# Altium PCB pcb.PcbDoc (part 2 of 3)
Units mil, origin at the board's own origin, x right, y up, seen from the top; angles counter-clockwise.
Board outline 2027.84 x 963.26 mil, 2 copper layers (Top Layer, Bottom Layer), stack 27.8 mil thick; 72 components, 62 nets, 350 pads, 49 vias.
Unrouted connection lines stored in the file: 14.
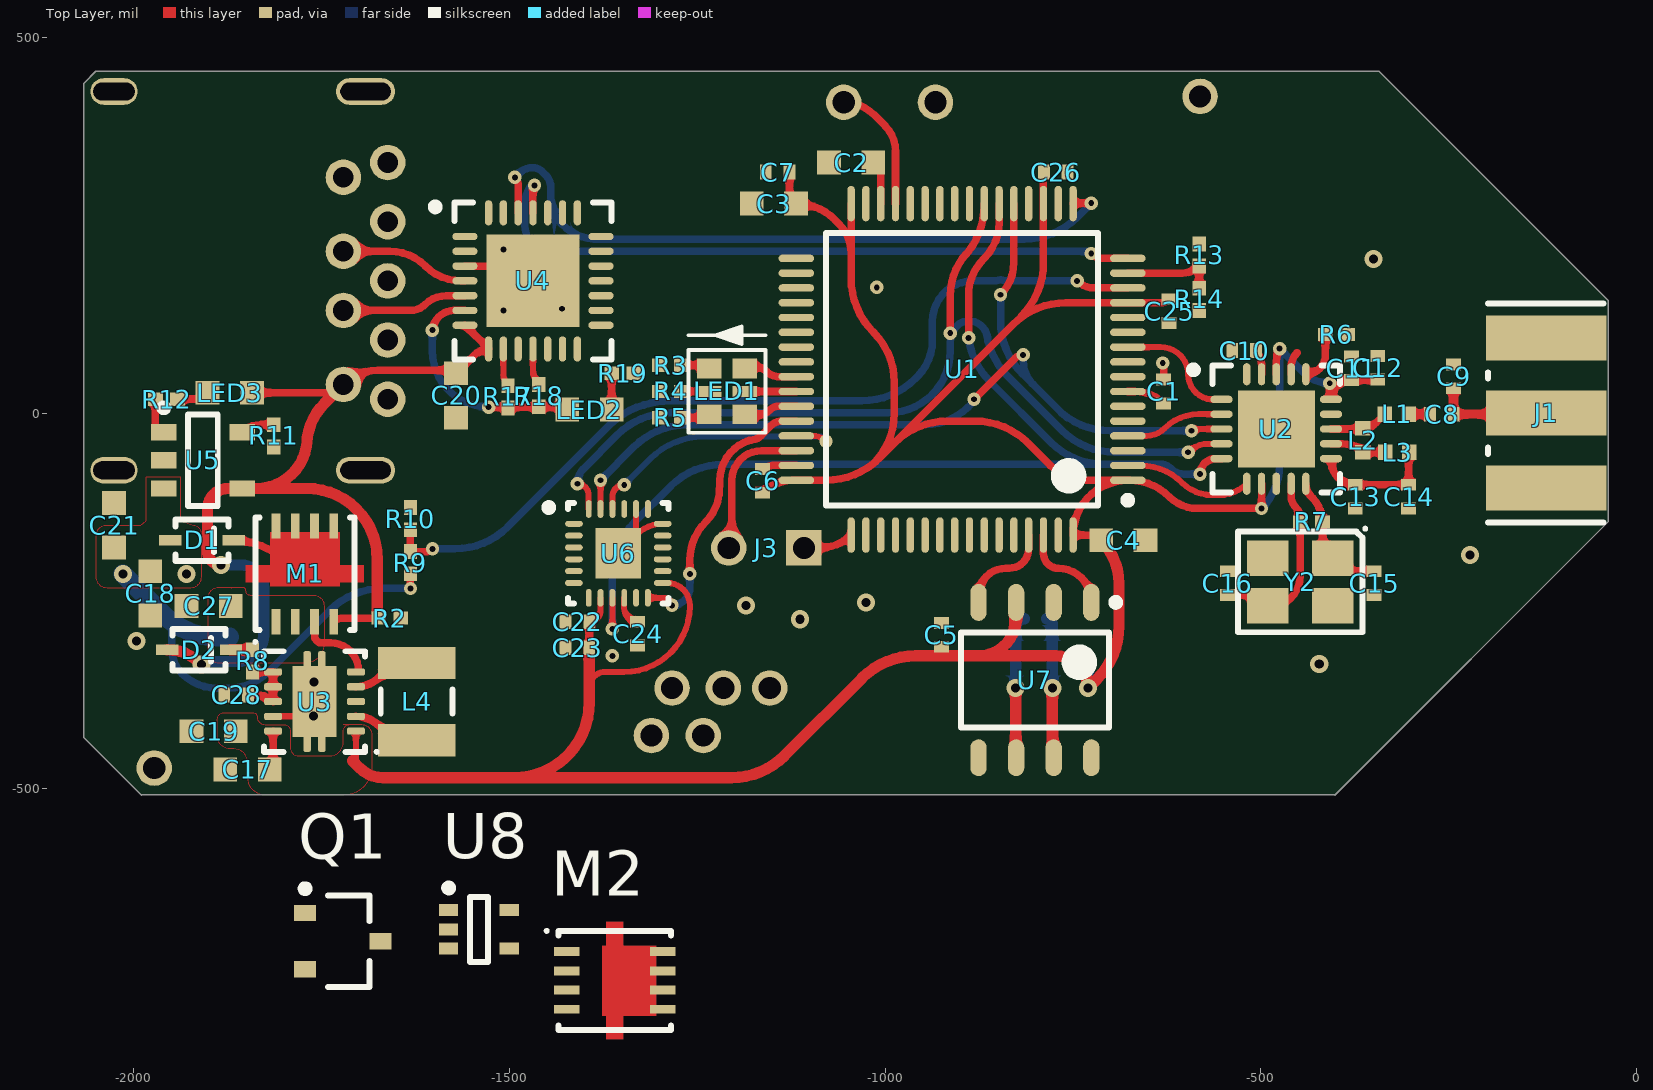
[diagram p0: Top Layer view]

## Part data (continued)
R1: library part R-120-0402, "120 Ohm 0402", Case Code (Imperial)=0402, Case Code (Metric)=1005, Manufacturer=Vishay, Manufacturer Part Number 1=CRCW040210K0FKED, Max Operating Temperature=155°C, Max Power Dissipation=63mW, Min Operating Temperature=-55°C, Package Quantity=10, Resistance=10kR, Supplier Part Number 1=541-10.0KLCT-ND, Temperature Coefficient=100ppm/°C, Tolerance=1%, Voltage Rating=50V, Case/Package=0402, ComponentLink1Description=http://www.yageo.com/documents/recent/PYu-RC_Group_51_RoHS_L_10.pdf?src-supplier=Digi-Key, ComponentLink1URL=http://www.yageo.com/documents/recent/PYu-RC_Group_51_RoHS_L_10.pdf?src-supplier=Digi-Key, ComponentLink2Description=http://www.farnell.com/datasheets/1018594.pdf?src-supplier=Element14, ComponentLink2URL=http://www.farnell.com/datasheets/1018594.pdf?src-supplier=Element14, ComponentLink3Description=http://www.mouser.com/ds/2/447/PYu-RC0402_51_RoHS_L_6_r-8721.pdf?src-supplier=Mouser, ComponentLink3URL=http://www.mouser.com/ds/2/447/PYu-RC0402_51_RoHS_L_6_r-8721.pdf?src-supplier=Mouser, ComponentLink4Description=http://www.vishay.com/docs/20008/dcrcw.pdf?src-supplier=Avnet+Europe, ComponentLink4URL=http://www.vishay.com/docs/20008/dcrcw.pdf?src-supplier=Avnet+Europe, ComponentLink5Description=https://www.verical.com/server-webapp/html/getDatasheet?partID=86831&src-supplier=Verical, ComponentLink5URL=https://www.verical.com/server-webapp/html/getDatasheet?partID=86831&src-supplier=Verical, ComponentLink6Description=http://www.farnell.com/datasheets/2310790.pdf?src-supplier=Allied+Electronics, ComponentLink6URL=http://www.farnell.com/datasheets/2310790.pdf?src-supplier=Allied+Electronics, ComponentLink7Description=http://www.vishay.com/docs/20035/dcrcwe3.pdf?src-supplier=Digi-Key, ComponentLink7URL=http://www.vishay.com/docs/20035/dcrcwe3.pdf?src-supplier=Digi-Key, ComponentLink8Description=http://www.farnell.com/datasheets/2310790.pdf?src-supplier=Mouser, ComponentLink8URL=http://www.farnell.com/datasheets/2310790.pdf?src-supplier=Mouser, ComponentLink9Description=http://www.farnell.com/datasheets/2111203.pdf?src-supplier=Element14, ComponentLink9URL=http://www.farnell.com/datasheets/2111203.pdf?src-supplier=Element14, ComponentLink10Description=http://www.farnell.com/datasheets/2310790.pdf?src-supplier=Avnet, ComponentLink10URL=http://www.farnell.com/datasheets/2310790.pdf?src-supplier=Avnet, ComponentLink11Description=http://www.vishay.com/docs/20035/dcrcwe3.pdf?src-supplier=Future+Electronics, ComponentLink11URL=http://www.vishay.com/docs/20035/dcrcwe3.pdf?src-supplier=Future+Electronics, ComponentLink12Description=http://uk.rs-online.com/webdocs/0d98/0900766b80d98afc.pdf?src-supplier=RSComponents, ComponentLink12URL=http://uk.rs-online.com/webdocs/0d98/0900766b80d98afc.pdf?src-supplier=RSComponents, ComponentLink13Description=http://www.farnell.com/datasheets/2310790.pdf?src-supplier=Distrelec, ComponentLink13URL=http://www.farnell.com/datasheets/2310790.pdf?src-supplier=Distrelec, ComponentLink14Description=http://uk.rs-online.com/webdocs/0d98/0900766b80d98824.pdf?src-supplier=RSComponents, ComponentLink14URL=http://uk.rs-online.com/webdocs/0d98/0900766b80d98824.pdf?src-supplier=RSComponents, ComponentLink15Description=http://www.farnell.com/datasheets/2045673.pdf?src-supplier=Element14, ComponentLink15URL=http://www.farnell.com/datasheets/2045673.pdf?src-supplier=Element14, ComponentLink16Description=http://www.vishay.com/docs/20035/dcrcwe3.pdf?src-supplier=Avnet, ComponentLink16URL=http://www.vishay.com/docs/20035/dcrcwe3.pdf?src-supplier=Avnet, ComponentLink17Description=http://www.vishay.com/docs/20035/dcrcwe3.pdf?src-supplier=Mouser, ComponentLink17URL=http://www.vishay.com/docs/20035/dcrcwe3.pdf?src-supplier=Mouser, ComponentLink18Description=https://www.distrelec.biz/Web/Downloads/a_/en/flD-CRCW-e3_data_en.pdf?mime=application%2Fpdf&src-supplier=Distrelec, ComponentLink18URL=https://www.distrelec.biz/Web/Downloads/a_/en/flD-CRCW-e3_data_en.pdf?mime=application%2Fpdf&src-supplier=Distrelec, Composition="Thick Film", Contact Plating=Tin, Depth=0.5mm, Description 1="RES SMD 10K OHM 1% 1/16W 0402", Features="Automotive AEC-Q200", Height=0.35mm, Lead Free="Lead Free", Length=1mm, Military Standard=Not, Mount="Surface Mount", Number of Pins=2, Number of Terminations=2, Packaging="Tape and Reel", Power Rating=63mW, Pricing="1=0.1, 10=0.042, 100=0.017, 1000=0.00765, 2500=0.00664, 5000=0.00549 (USD)", Radiation Hardening=No, REACH SVHC=Unknown, Stock=713181, Supplier 1=Digi-Key, Termination=SMD/SMT, Voltage Rating (DC)=50V, Weight=2.3E-05oz, Width=0.02inch
R2 R9 R10 R14: library part R-10k-0402, Case Code (Imperial)=0402, Case Code (Metric)=1005, Manufacturer=Vishay, Manufacturer Part Number 1=CRCW040210K0FKED, Max Operating Temperature=155°C, Max Power Dissipation=63mW, Min Operating Temperature=-55°C, Package Quantity=10, Resistance=10kR, Supplier Part Number 1=541-10.0KLCT-ND, Temperature Coefficient=100ppm/°C, Tolerance=1%, Voltage Rating=50V, Case/Package=0402, ComponentLink1Description=http://www.yageo.com/documents/recent/PYu-RC_Group_51_RoHS_L_10.pdf?src-supplier=Digi-Key, ComponentLink1URL=http://www.yageo.com/documents/recent/PYu-RC_Group_51_RoHS_L_10.pdf?src-supplier=Digi-Key, ComponentLink2Description=http://www.farnell.com/datasheets/1018594.pdf?src-supplier=Element14, ComponentLink2URL=http://www.farnell.com/datasheets/1018594.pdf?src-supplier=Element14, ComponentLink3Description=http://www.mouser.com/ds/2/447/PYu-RC0402_51_RoHS_L_6_r-8721.pdf?src-supplier=Mouser, ComponentLink3URL=http://www.mouser.com/ds/2/447/PYu-RC0402_51_RoHS_L_6_r-8721.pdf?src-supplier=Mouser, ComponentLink4Description=http://www.vishay.com/docs/20008/dcrcw.pdf?src-supplier=Avnet+Europe, ComponentLink4URL=http://www.vishay.com/docs/20008/dcrcw.pdf?src-supplier=Avnet+Europe, ComponentLink5Description=https://www.verical.com/server-webapp/html/getDatasheet?partID=86831&src-supplier=Verical, ComponentLink5URL=https://www.verical.com/server-webapp/html/getDatasheet?partID=86831&src-supplier=Verical, ComponentLink6Description=http://www.farnell.com/datasheets/2310790.pdf?src-supplier=Allied+Electronics, ComponentLink6URL=http://www.farnell.com/datasheets/2310790.pdf?src-supplier=Allied+Electronics, ComponentLink7Description=http://www.vishay.com/docs/20035/dcrcwe3.pdf?src-supplier=Digi-Key, ComponentLink7URL=http://www.vishay.com/docs/20035/dcrcwe3.pdf?src-supplier=Digi-Key, ComponentLink8Description=http://www.farnell.com/datasheets/2310790.pdf?src-supplier=Mouser, ComponentLink8URL=http://www.farnell.com/datasheets/2310790.pdf?src-supplier=Mouser, ComponentLink9Description=http://www.farnell.com/datasheets/2111203.pdf?src-supplier=Element14, ComponentLink9URL=http://www.farnell.com/datasheets/2111203.pdf?src-supplier=Element14, ComponentLink10Description=http://www.farnell.com/datasheets/2310790.pdf?src-supplier=Avnet, ComponentLink10URL=http://www.farnell.com/datasheets/2310790.pdf?src-supplier=Avnet, ComponentLink11Description=http://www.vishay.com/docs/20035/dcrcwe3.pdf?src-supplier=Future+Electronics, ComponentLink11URL=http://www.vishay.com/docs/20035/dcrcwe3.pdf?src-supplier=Future+Electronics, ComponentLink12Description=http://uk.rs-online.com/webdocs/0d98/0900766b80d98afc.pdf?src-supplier=RSComponents, ComponentLink12URL=http://uk.rs-online.com/webdocs/0d98/0900766b80d98afc.pdf?src-supplier=RSComponents, ComponentLink13Description=http://www.farnell.com/datasheets/2310790.pdf?src-supplier=Distrelec, ComponentLink13URL=http://www.farnell.com/datasheets/2310790.pdf?src-supplier=Distrelec, ComponentLink14Description=http://uk.rs-online.com/webdocs/0d98/0900766b80d98824.pdf?src-supplier=RSComponents, ComponentLink14URL=http://uk.rs-online.com/webdocs/0d98/0900766b80d98824.pdf?src-supplier=RSComponents, ComponentLink15Description=http://www.farnell.com/datasheets/2045673.pdf?src-supplier=Element14, ComponentLink15URL=http://www.farnell.com/datasheets/2045673.pdf?src-supplier=Element14, ComponentLink16Description=http://www.vishay.com/docs/20035/dcrcwe3.pdf?src-supplier=Avnet, ComponentLink16URL=http://www.vishay.com/docs/20035/dcrcwe3.pdf?src-supplier=Avnet, ComponentLink17Description=http://www.vishay.com/docs/20035/dcrcwe3.pdf?src-supplier=Mouser, ComponentLink17URL=http://www.vishay.com/docs/20035/dcrcwe3.pdf?src-supplier=Mouser, ComponentLink18Description=https://www.distrelec.biz/Web/Downloads/a_/en/flD-CRCW-e3_data_en.pdf?mime=application%2Fpdf&src-supplier=Distrelec, ComponentLink18URL=https://www.distrelec.biz/Web/Downloads/a_/en/flD-CRCW-e3_data_en.pdf?mime=application%2Fpdf&src-supplier=Distrelec, Composition="Thick Film", Contact Plating=Tin, Depth=0.5mm, Description 1="RES SMD 10K OHM 1% 1/16W 0402", Features="Automotive AEC-Q200", Height=0.35mm, Lead Free="Lead Free", Length=1mm, Military Standard=Not, Mount="Surface Mount", Number of Pins=2, Number of Terminations=2, Packaging="Tape and Reel", Power Rating=63mW, Pricing="1=0.1, 10=0.042, 100=0.017, 1000=0.00765, 2500=0.00664, 5000=0.00549 (USD)", Radiation Hardening=No, REACH SVHC=Unknown, Stock=713181, Supplier 1=Digi-Key, Termination=SMD/SMT, Voltage Rating (DC)=50V, Weight=2.3E-05oz, Width=0.02inch
R3 R4 R5 R12 R19: library part R-470-0402, Case/Package=0402, Case Code (Metric)=1005, Manufacturer=Yageo, Manufacturer Part Number=RC0402JR-07470RL, Max Operating Temperature=155°C, Max Power Dissipation=63mW, Min Operating Temperature=-55°C, Package Quantity=1, Power Rating=62.5mW, Resistance=470R, Supplier Part Number 1=311-470JRDKR-ND, Temperature Coefficient=100ppm/°C, Tolerance=5%, Voltage Rating=50V, Case Code (Imperial)=0402, ComponentLink1Description=http://www.yageo.com/documents/recent/PYu-RC_Group_51_RoHS_L_10.pdf?src-supplier=Digi-Key, ComponentLink1URL=http://www.yageo.com/documents/recent/PYu-RC_Group_51_RoHS_L_10.pdf?src-supplier=Digi-Key, ComponentLink2Description=http://www.farnell.com/datasheets/1018594.pdf?src-supplier=Element14, ComponentLink2URL=http://www.farnell.com/datasheets/1018594.pdf?src-supplier=Element14, ComponentLink3Description=http://www.mouser.com/ds/2/447/PYu-RC0402_51_RoHS_L_6_r-8721.pdf?src-supplier=Mouser, ComponentLink3URL=http://www.mouser.com/ds/2/447/PYu-RC0402_51_RoHS_L_6_r-8721.pdf?src-supplier=Mouser, Composition="Thick Film", Depth=0.5mm, Description 1="RES SMD 470 OHM 5% 1/16W 0402", Features="Moisture Resistant", Height=0.016inch, Lead Free="Lead Free", Length=1mm, Military Standard=Not, Number of Terminations=2, Packaging="Tape and Reel", Pricing="1=0.1, 10=0.013, 100=0.0055, 1000=0.00245, 2500=0.00212, 5000=0.00176 (USD)", REACH SVHC=Unknown, Stock=2903670, Supplier 1=Digi-Key, Termination=SMD/SMT, Width=0.02inch, Working Voltage=50V
R6: library part R-22k-0402, Case/Package=0402, Case Code (Metric)=1005, Manufacturer=Vishay, Manufacturer Part Number 1=CRCW040222K0FKED, Max Operating Temperature=155°C, Max Power Dissipation=63mW, Min Operating Temperature=-55°C, Package Quantity=10, Resistance=22kR, Supplier Part Number 1=541-22.0KLDKR-ND, Temperature Coefficient=100ppm/°C, Tolerance=1%, Voltage Rating=50V, Case Code (Imperial)=0402, ComponentLink1Description=http://www.yageo.com/documents/recent/PYu-RC_Group_51_RoHS_L_10.pdf?src-supplier=Digi-Key, ComponentLink1URL=http://www.yageo.com/documents/recent/PYu-RC_Group_51_RoHS_L_10.pdf?src-supplier=Digi-Key, ComponentLink2Description=http://www.farnell.com/datasheets/1018594.pdf?src-supplier=Element14, ComponentLink2URL=http://www.farnell.com/datasheets/1018594.pdf?src-supplier=Element14, ComponentLink3Description=http://www.mouser.com/ds/2/447/PYu-RC0402_51_RoHS_L_6_r-8721.pdf?src-supplier=Mouser, ComponentLink3URL=http://www.mouser.com/ds/2/447/PYu-RC0402_51_RoHS_L_6_r-8721.pdf?src-supplier=Mouser, ComponentLink4Description=http://www.vishay.com/docs/20008/dcrcw.pdf?src-supplier=Avnet+Europe, ComponentLink4URL=http://www.vishay.com/docs/20008/dcrcw.pdf?src-supplier=Avnet+Europe, ComponentLink5Description=https://www.verical.com/server-webapp/html/getDatasheet?partID=86831&src-supplier=Verical, ComponentLink5URL=https://www.verical.com/server-webapp/html/getDatasheet?partID=86831&src-supplier=Verical, ComponentLink6Description=http://www.farnell.com/datasheets/2310790.pdf?src-supplier=Allied+Electronics, ComponentLink6URL=http://www.farnell.com/datasheets/2310790.pdf?src-supplier=Allied+Electronics, ComponentLink7Description=http://www.vishay.com/docs/20035/dcrcwe3.pdf?src-supplier=Digi-Key, ComponentLink7URL=http://www.vishay.com/docs/20035/dcrcwe3.pdf?src-supplier=Digi-Key, ComponentLink8Description=http://www.farnell.com/datasheets/2310790.pdf?src-supplier=Mouser, ComponentLink8URL=http://www.farnell.com/datasheets/2310790.pdf?src-supplier=Mouser, ComponentLink9Description=http://www.farnell.com/datasheets/2111203.pdf?src-supplier=Element14, ComponentLink9URL=http://www.farnell.com/datasheets/2111203.pdf?src-supplier=Element14, ComponentLink10Description=http://www.farnell.com/datasheets/2310790.pdf?src-supplier=Avnet, ComponentLink10URL=http://www.farnell.com/datasheets/2310790.pdf?src-supplier=Avnet, ComponentLink11Description=http://www.vishay.com/docs/20035/dcrcwe3.pdf?src-supplier=Future+Electronics, ComponentLink11URL=http://www.vishay.com/docs/20035/dcrcwe3.pdf?src-supplier=Future+Electronics, ComponentLink12Description=http://uk.rs-online.com/webdocs/0d98/0900766b80d98afc.pdf?src-supplier=RSComponents, ComponentLink12URL=http://uk.rs-online.com/webdocs/0d98/0900766b80d98afc.pdf?src-supplier=RSComponents, ComponentLink13Description=http://www.farnell.com/datasheets/2310790.pdf?src-supplier=Distrelec, ComponentLink13URL=http://www.farnell.com/datasheets/2310790.pdf?src-supplier=Distrelec, ComponentLink14Description=http://uk.rs-online.com/webdocs/0d98/0900766b80d98824.pdf?src-supplier=RSComponents, ComponentLink14URL=http://uk.rs-online.com/webdocs/0d98/0900766b80d98824.pdf?src-supplier=RSComponents, ComponentLink15Description=http://www.mouser.com/ds/2/427/dcrcwe3-109170.pdf?src-supplier=Mouser, ComponentLink15URL=http://www.mouser.com/ds/2/427/dcrcwe3-109170.pdf?src-supplier=Mouser, ComponentLink16Description=http://www.farnell.com/datasheets/2045673.pdf?src-supplier=Element14, ComponentLink16URL=http://www.farnell.com/datasheets/2045673.pdf?src-supplier=Element14, ComponentLink17Description=http://www.alliedelec.com/m/d/0c934d6939ccefa68dbe0b96d821c8cf.pdf?src-supplier=Allied+Electronics, ComponentLink17URL=http://www.alliedelec.com/m/d/0c934d6939ccefa68dbe0b96d821c8cf.pdf?src-supplier=Allied+Electronics, ComponentLink18Description=http://www.vishay.com/docs/20035/dcrcwe3.pdf?src-supplier=Avnet+Europe, ComponentLink18URL=http://www.vishay.com/docs/20035/dcrcwe3.pdf?src-supplier=Avnet+Europe, ComponentLink19Description=https://www.distrelec.biz/Web/Downloads/a_/en/flD-CRCW-e3_data_en.pdf?mime=application%2Fpdf&src-supplier=Distrelec, ComponentLink19URL=https://www.distrelec.biz/Web/Downloads/a_/en/flD-CRCW-e3_data_en.pdf?mime=application%2Fpdf&src-supplier=Distrelec, Composition="Thick Film", Contact Plating=Tin, Depth=0.5mm, Description 1="RES SMD 22K OHM 1% 1/16W 0402", Features="Automotive AEC-Q200", Height=0.35mm, Lead Free="Lead Free", Length=1mm, Military Standard=Not, Mount="Surface Mount", Number of Terminations=2, Packaging="Tape and Reel", Power Rating=63mW, Pricing="1=0.1, 10=0.042, 100=0.017, 1000=0.00765, 2500=0.00664, 5000=0.00549 (USD)", Radiation Hardening=No, REACH SVHC=Unknown, Stock=78716, Supplier 1=Digi-Key, Termination=SMD/SMT, Voltage Rating (DC)=50V, Weight=2.3E-05oz, Width=0.5mm, Working Voltage=50V
R7: library part R-1M-0402, Case/Package=0402, Case Code (Metric)=1005, Manufacturer="Stackpole Electronics", Manufacturer Part Number 1=RMCF0402FT1M00, Max Operating Temperature=155°C, Max Power Dissipation=63mW, Min Operating Temperature=-55°C, Power Rating=62.5mW, Resistance=1MR, Supplier Part Number 1=RMCF0402FT1M00DKR-ND, Temperature Coefficient=100ppm/°C, Tolerance=1%, Case Code (Imperial)=0402, ComponentLink1Description=http://www.yageo.com/documents/recent/PYu-RC_Group_51_RoHS_L_10.pdf?src-supplier=Digi-Key, ComponentLink1URL=http://www.yageo.com/documents/recent/PYu-RC_Group_51_RoHS_L_10.pdf?src-supplier=Digi-Key, ComponentLink2Description=http://www.farnell.com/datasheets/1018594.pdf?src-supplier=Element14, ComponentLink2URL=http://www.farnell.com/datasheets/1018594.pdf?src-supplier=Element14, ComponentLink3Description=http://www.mouser.com/ds/2/447/PYu-RC0402_51_RoHS_L_6_r-8721.pdf?src-supplier=Mouser, ComponentLink3URL=http://www.mouser.com/ds/2/447/PYu-RC0402_51_RoHS_L_6_r-8721.pdf?src-supplier=Mouser, ComponentLink4Description=http://www.vishay.com/docs/20008/dcrcw.pdf?src-supplier=Avnet+Europe, ComponentLink4URL=http://www.vishay.com/docs/20008/dcrcw.pdf?src-supplier=Avnet+Europe, ComponentLink5Description=https://www.verical.com/server-webapp/html/getDatasheet?partID=86831&src-supplier=Verical, ComponentLink5URL=https://www.verical.com/server-webapp/html/getDatasheet?partID=86831&src-supplier=Verical, ComponentLink6Description=http://www.farnell.com/datasheets/2310790.pdf?src-supplier=Allied+Electronics, ComponentLink6URL=http://www.farnell.com/datasheets/2310790.pdf?src-supplier=Allied+Electronics, ComponentLink7Description=http://www.vishay.com/docs/20035/dcrcwe3.pdf?src-supplier=Digi-Key, ComponentLink7URL=http://www.vishay.com/docs/20035/dcrcwe3.pdf?src-supplier=Digi-Key, ComponentLink8Description=http://www.farnell.com/datasheets/2310790.pdf?src-supplier=Mouser, ComponentLink8URL=http://www.farnell.com/datasheets/2310790.pdf?src-supplier=Mouser, ComponentLink9Description=http://www.farnell.com/datasheets/2111203.pdf?src-supplier=Element14, ComponentLink9URL=http://www.farnell.com/datasheets/2111203.pdf?src-supplier=Element14, ComponentLink10Description=http://www.farnell.com/datasheets/2310790.pdf?src-supplier=Avnet, ComponentLink10URL=http://www.farnell.com/datasheets/2310790.pdf?src-supplier=Avnet, ComponentLink11Description=http://www.vishay.com/docs/20035/dcrcwe3.pdf?src-supplier=Future+Electronics, ComponentLink11URL=http://www.vishay.com/docs/20035/dcrcwe3.pdf?src-supplier=Future+Electronics, ComponentLink12Description=http://uk.rs-online.com/webdocs/0d98/0900766b80d98afc.pdf?src-supplier=RSComponents, ComponentLink12URL=http://uk.rs-online.com/webdocs/0d98/0900766b80d98afc.pdf?src-supplier=RSComponents, ComponentLink13Description=http://www.farnell.com/datasheets/2310790.pdf?src-supplier=Distrelec, ComponentLink13URL=http://www.farnell.com/datasheets/2310790.pdf?src-supplier=Distrelec, ComponentLink14Description=https://www.verical.com/server-webapp/html/getDatasheet?partID=362040&src-supplier=Verical, ComponentLink14URL=https://www.verical.com/server-webapp/html/getDatasheet?partID=362040&src-supplier=Verical, Composition="Thick Film", Contact Plating=Tin,Matte, Depth=0.5mm, Description 1="RES 1M OHM 1% 1/16W 0402", Features="Automotive AEC-Q200", Height=0.016inch, Lead Free="Lead Free", Length=1mm, Military Standard=Not, Mount="Surface Mount", Number of Terminations=2, Packaging="Tape and Reel", Pricing="1=0.1, 10=0.015, 100=0.0061, 1000=0.00275, 2500=0.00239, 5000=0.00198 (USD)", Radiation Hardening=No, Stock=356880, Supplier 1=Digi-Key, Width=0.02inch
R8: library part R-100-0402, Case Code (Imperial)=0402, Case Code (Metric)=1005, Manufacturer=Yageo, Manufacturer Part Number=RC0402JR-07470RL, Max Operating Temperature=155°C, Max Power Dissipation=63mW, Min Operating Temperature=-55°C, Package Quantity=1, Power Rating=62.5mW, Resistance=470R, Supplier Part Number 1=311-470JRDKR-ND, Temperature Coefficient=100ppm/°C, Tolerance=5%, Voltage Rating=50V, Case/Package=0402, ComponentLink1Description=http://www.yageo.com/documents/recent/PYu-RC_Group_51_RoHS_L_10.pdf?src-supplier=Digi-Key, ComponentLink1URL=http://www.yageo.com/documents/recent/PYu-RC_Group_51_RoHS_L_10.pdf?src-supplier=Digi-Key, ComponentLink2Description=http://www.farnell.com/datasheets/1018594.pdf?src-supplier=Element14, ComponentLink2URL=http://www.farnell.com/datasheets/1018594.pdf?src-supplier=Element14, ComponentLink3Description=http://www.mouser.com/ds/2/447/PYu-RC0402_51_RoHS_L_6_r-8721.pdf?src-supplier=Mouser, ComponentLink3URL=http://www.mouser.com/ds/2/447/PYu-RC0402_51_RoHS_L_6_r-8721.pdf?src-supplier=Mouser, Composition="Thick Film", Depth=0.5mm, Description 1="RES SMD 470 OHM 5% 1/16W 0402", Features="Moisture Resistant", Height=0.016inch, Lead Free="Lead Free", Length=1mm, Military Standard=Not, Number of Terminations=2, Packaging="Tape and Reel", Pricing="1=0.1, 10=0.013, 100=0.0055, 1000=0.00245, 2500=0.00212, 5000=0.00176 (USD)", REACH SVHC=Unknown, Stock=2903670, Supplier 1=Digi-Key, Termination=SMD/SMT, Width=0.02inch, Working Voltage=50V
R11: library part R-2k-0402, Case/Package=0402, Case Code (Metric)=1005, Manufacturer=Vishay, Manufacturer Part Number 1=CRCW040210K0FKED, Max Operating Temperature=155°C, Max Power Dissipation=63mW, Min Operating Temperature=-55°C, Package Quantity=10, Resistance=10kR, Supplier Part Number 1=541-10.0KLCT-ND, Temperature Coefficient=100ppm/°C, Tolerance=1%, Voltage Rating=50V, Case Code (Imperial)=0402, ComponentLink1Description=http://www.yageo.com/documents/recent/PYu-RC_Group_51_RoHS_L_10.pdf?src-supplier=Digi-Key, ComponentLink1URL=http://www.yageo.com/documents/recent/PYu-RC_Group_51_RoHS_L_10.pdf?src-supplier=Digi-Key, ComponentLink2Description=http://www.farnell.com/datasheets/1018594.pdf?src-supplier=Element14, ComponentLink2URL=http://www.farnell.com/datasheets/1018594.pdf?src-supplier=Element14, ComponentLink3Description=http://www.mouser.com/ds/2/447/PYu-RC0402_51_RoHS_L_6_r-8721.pdf?src-supplier=Mouser, ComponentLink3URL=http://www.mouser.com/ds/2/447/PYu-RC0402_51_RoHS_L_6_r-8721.pdf?src-supplier=Mouser, ComponentLink4Description=http://www.vishay.com/docs/20008/dcrcw.pdf?src-supplier=Avnet+Europe, ComponentLink4URL=http://www.vishay.com/docs/20008/dcrcw.pdf?src-supplier=Avnet+Europe, ComponentLink5Description=https://www.verical.com/server-webapp/html/getDatasheet?partID=86831&src-supplier=Verical, ComponentLink5URL=https://www.verical.com/server-webapp/html/getDatasheet?partID=86831&src-supplier=Verical, ComponentLink6Description=http://www.farnell.com/datasheets/2310790.pdf?src-supplier=Allied+Electronics, ComponentLink6URL=http://www.farnell.com/datasheets/2310790.pdf?src-supplier=Allied+Electronics, ComponentLink7Description=http://www.vishay.com/docs/20035/dcrcwe3.pdf?src-supplier=Digi-Key, ComponentLink7URL=http://www.vishay.com/docs/20035/dcrcwe3.pdf?src-supplier=Digi-Key, ComponentLink8Description=http://www.farnell.com/datasheets/2310790.pdf?src-supplier=Mouser, ComponentLink8URL=http://www.farnell.com/datasheets/2310790.pdf?src-supplier=Mouser, ComponentLink9Description=http://www.farnell.com/datasheets/2111203.pdf?src-supplier=Element14, ComponentLink9URL=http://www.farnell.com/datasheets/2111203.pdf?src-supplier=Element14, ComponentLink10Description=http://www.farnell.com/datasheets/2310790.pdf?src-supplier=Avnet, ComponentLink10URL=http://www.farnell.com/datasheets/2310790.pdf?src-supplier=Avnet, ComponentLink11Description=http://www.vishay.com/docs/20035/dcrcwe3.pdf?src-supplier=Future+Electronics, ComponentLink11URL=http://www.vishay.com/docs/20035/dcrcwe3.pdf?src-supplier=Future+Electronics, ComponentLink12Description=http://uk.rs-online.com/webdocs/0d98/0900766b80d98afc.pdf?src-supplier=RSComponents, ComponentLink12URL=http://uk.rs-online.com/webdocs/0d98/0900766b80d98afc.pdf?src-supplier=RSComponents, ComponentLink13Description=http://www.farnell.com/datasheets/2310790.pdf?src-supplier=Distrelec, ComponentLink13URL=http://www.farnell.com/datasheets/2310790.pdf?src-supplier=Distrelec, ComponentLink14Description=http://uk.rs-online.com/webdocs/0d98/0900766b80d98824.pdf?src-supplier=RSComponents, ComponentLink14URL=http://uk.rs-online.com/webdocs/0d98/0900766b80d98824.pdf?src-supplier=RSComponents, ComponentLink15Description=http://www.farnell.com/datasheets/2045673.pdf?src-supplier=Element14, ComponentLink15URL=http://www.farnell.com/datasheets/2045673.pdf?src-supplier=Element14, ComponentLink16Description=http://www.vishay.com/docs/20035/dcrcwe3.pdf?src-supplier=Avnet, ComponentLink16URL=http://www.vishay.com/docs/20035/dcrcwe3.pdf?src-supplier=Avnet, ComponentLink17Description=http://www.vishay.com/docs/20035/dcrcwe3.pdf?src-supplier=Mouser, ComponentLink17URL=http://www.vishay.com/docs/20035/dcrcwe3.pdf?src-supplier=Mouser, ComponentLink18Description=https://www.distrelec.biz/Web/Downloads/a_/en/flD-CRCW-e3_data_en.pdf?mime=application%2Fpdf&src-supplier=Distrelec, ComponentLink18URL=https://www.distrelec.biz/Web/Downloads/a_/en/flD-CRCW-e3_data_en.pdf?mime=application%2Fpdf&src-supplier=Distrelec, Composition="Thick Film", Contact Plating=Tin, Depth=0.5mm, Description 1="RES SMD 10K OHM 1% 1/16W 0402", Features="Automotive AEC-Q200", Height=0.35mm, Lead Free="Lead Free", Length=1mm, Military Standard=Not, Mount="Surface Mount", Number of Pins=2, Number of Terminations=2, Packaging="Tape and Reel", Power Rating=63mW, Pricing="1=0.1, 10=0.042, 100=0.017, 1000=0.00765, 2500=0.00664, 5000=0.00549 (USD)", Radiation Hardening=No, REACH SVHC=Unknown, Stock=713181, Supplier 1=Digi-Key, Termination=SMD/SMT, Voltage Rating (DC)=50V, Weight=2.3E-05oz, Width=0.02inch
R13: library part R-100k-0402, Case Code (Imperial)=0402, Case Code (Metric)=1005, Manufacturer=Panasonic, Manufacturer Part Number=ERJ2RKF1003X, Max Operating Temperature=155°C, Max Power Dissipation=100mW, Min Operating Temperature=-55°C, Package Quantity=1, Resistance=100kR, Temperature Coefficient=100ppm/°C, Tolerance=1%, Voltage Rating=50V, Case/Package=0402, ComponentLink1Description=http://industrial.panasonic.com/www-data/pdf/AOA0000/AOA0000CE2.pdf?src-supplier=Element14, ComponentLink1URL=http://industrial.panasonic.com/www-data/pdf/AOA0000/AOA0000CE2.pdf?src-supplier=Element14, ComponentLink2Description=http://industrial.panasonic.com/www-data/pdf/AOA0000/AOA0000CE2.pdf?src-supplier=Avnet+Asia, ComponentLink2URL=http://industrial.panasonic.com/www-data/pdf/AOA0000/AOA0000CE2.pdf?src-supplier=Avnet+Asia, ComponentLink3Description=https://industrial.panasonic.com/cdbs/www-data/pdf/RDA0000/DMA0000COL11.pdf?src-supplier=Allied+Electronics, ComponentLink3URL=https://industrial.panasonic.com/cdbs/www-data/pdf/RDA0000/DMA0000COL11.pdf?src-supplier=Allied+Electronics, ComponentLink4Description=http://www.farnell.com/datasheets/1911175.pdf?src-supplier=Farnell, ComponentLink4URL=http://www.farnell.com/datasheets/1911175.pdf?src-supplier=Farnell, ComponentLink5Description=http://industrial.panasonic.com/www-data/pdf/AOA0000/AOA0000CE2.pdf?src-supplier=Future+Electronics, ComponentLink5URL=http://industrial.panasonic.com/www-data/pdf/AOA0000/AOA0000CE2.pdf?src-supplier=Future+Electronics, ComponentLink6Description=http://www.farnell.com/datasheets/1911175.pdf?src-supplier=Element14, ComponentLink6URL=http://www.farnell.com/datasheets/1911175.pdf?src-supplier=Element14, ComponentLink7Description=http://www.alliedelec.com/m/d/623f45ff1957d936ff56d46fd1c28cac.pdf?src-supplier=Allied+Electronics, ComponentLink7URL=http://www.alliedelec.com/m/d/623f45ff1957d936ff56d46fd1c28cac.pdf?src-supplier=Allied+Electronics, ComponentLink8Description=http://www.farnell.com/datasheets/426256.pdf?src-supplier=Element14, ComponentLink8URL=http://www.farnell.com/datasheets/426256.pdf?src-supplier=Element14, ComponentLink9Description=http://www.jameco.com/Jameco/Products/ProdDS/1987038.pdf?src-supplier=Jameco, ComponentLink9URL=http://www.jameco.com/Jameco/Products/ProdDS/1987038.pdf?src-supplier=Jameco, ComponentLink10Description=http://industrial.panasonic.com/www-data/pdf/AOA0000/AOA0000CE2.pdf?src-supplier=Avnet, ComponentLink10URL=http://industrial.panasonic.com/www-data/pdf/AOA0000/AOA0000CE2.pdf?src-supplier=Avnet, Composition="Thick Film", Contact Plating=Tin, Depth=0.5mm, Features="Automotive AEC-Q200", Height=0.35mm, Lead Free="Lead Free", Length=1mm, Military Standard=Not, Mount="Surface Mount", Number of Pins=2, Number of Terminations=2, Packaging="Tape and Reel", Power Rating=100mW, Radiation Hardening=No, REACH SVHC="No SVHC", Stock 1=0, Supplier 1=RSComponents, Termination=SMD/SMT, Voltage Rating (DC)=50V, Width=0.5mm
R17 R18: library part R-10k-0402, Case/Package=0402, Case Code (Metric)=1005, Manufacturer=Vishay, Manufacturer Part Number 1=CRCW040210K0FKED, Max Operating Temperature=155°C, Max Power Dissipation=63mW, Min Operating Temperature=-55°C, Package Quantity=10, Resistance=10kR, Supplier Part Number 1=541-10.0KLCT-ND, Temperature Coefficient=100ppm/°C, Tolerance=1%, Voltage Rating=50V, Case Code (Imperial)=0402, ComponentLink1Description=http://www.yageo.com/documents/recent/PYu-RC_Group_51_RoHS_L_10.pdf?src-supplier=Digi-Key, ComponentLink1URL=http://www.yageo.com/documents/recent/PYu-RC_Group_51_RoHS_L_10.pdf?src-supplier=Digi-Key, ComponentLink2Description=http://www.farnell.com/datasheets/1018594.pdf?src-supplier=Element14, ComponentLink2URL=http://www.farnell.com/datasheets/1018594.pdf?src-supplier=Element14, ComponentLink3Description=http://www.mouser.com/ds/2/447/PYu-RC0402_51_RoHS_L_6_r-8721.pdf?src-supplier=Mouser, ComponentLink3URL=http://www.mouser.com/ds/2/447/PYu-RC0402_51_RoHS_L_6_r-8721.pdf?src-supplier=Mouser, ComponentLink4Description=http://www.vishay.com/docs/20008/dcrcw.pdf?src-supplier=Avnet+Europe, ComponentLink4URL=http://www.vishay.com/docs/20008/dcrcw.pdf?src-supplier=Avnet+Europe, ComponentLink5Description=https://www.verical.com/server-webapp/html/getDatasheet?partID=86831&src-supplier=Verical, ComponentLink5URL=https://www.verical.com/server-webapp/html/getDatasheet?partID=86831&src-supplier=Verical, ComponentLink6Description=http://www.farnell.com/datasheets/2310790.pdf?src-supplier=Allied+Electronics, ComponentLink6URL=http://www.farnell.com/datasheets/2310790.pdf?src-supplier=Allied+Electronics, ComponentLink7Description=http://www.vishay.com/docs/20035/dcrcwe3.pdf?src-supplier=Digi-Key, ComponentLink7URL=http://www.vishay.com/docs/20035/dcrcwe3.pdf?src-supplier=Digi-Key, ComponentLink8Description=http://www.farnell.com/datasheets/2310790.pdf?src-supplier=Mouser, ComponentLink8URL=http://www.farnell.com/datasheets/2310790.pdf?src-supplier=Mouser, ComponentLink9Description=http://www.farnell.com/datasheets/2111203.pdf?src-supplier=Element14, ComponentLink9URL=http://www.farnell.com/datasheets/2111203.pdf?src-supplier=Element14, ComponentLink10Description=http://www.farnell.com/datasheets/2310790.pdf?src-supplier=Avnet, ComponentLink10URL=http://www.farnell.com/datasheets/2310790.pdf?src-supplier=Avnet, ComponentLink11Description=http://www.vishay.com/docs/20035/dcrcwe3.pdf?src-supplier=Future+Electronics, ComponentLink11URL=http://www.vishay.com/docs/20035/dcrcwe3.pdf?src-supplier=Future+Electronics, ComponentLink12Description=http://uk.rs-online.com/webdocs/0d98/0900766b80d98afc.pdf?src-supplier=RSComponents, ComponentLink12URL=http://uk.rs-online.com/webdocs/0d98/0900766b80d98afc.pdf?src-supplier=RSComponents, ComponentLink13Description=http://www.farnell.com/datasheets/2310790.pdf?src-supplier=Distrelec, ComponentLink13URL=http://www.farnell.com/datasheets/2310790.pdf?src-supplier=Distrelec, ComponentLink14Description=http://uk.rs-online.com/webdocs/0d98/0900766b80d98824.pdf?src-supplier=RSComponents, ComponentLink14URL=http://uk.rs-online.com/webdocs/0d98/0900766b80d98824.pdf?src-supplier=RSComponents, ComponentLink15Description=http://www.farnell.com/datasheets/2045673.pdf?src-supplier=Element14, ComponentLink15URL=http://www.farnell.com/datasheets/2045673.pdf?src-supplier=Element14, ComponentLink16Description=http://www.vishay.com/docs/20035/dcrcwe3.pdf?src-supplier=Avnet, ComponentLink16URL=http://www.vishay.com/docs/20035/dcrcwe3.pdf?src-supplier=Avnet, ComponentLink17Description=http://www.vishay.com/docs/20035/dcrcwe3.pdf?src-supplier=Mouser, ComponentLink17URL=http://www.vishay.com/docs/20035/dcrcwe3.pdf?src-supplier=Mouser, ComponentLink18Description=https://www.distrelec.biz/Web/Downloads/a_/en/flD-CRCW-e3_data_en.pdf?mime=application%2Fpdf&src-supplier=Distrelec, ComponentLink18URL=https://www.distrelec.biz/Web/Downloads/a_/en/flD-CRCW-e3_data_en.pdf?mime=application%2Fpdf&src-supplier=Distrelec, Composition="Thick Film", Contact Plating=Tin, Depth=0.5mm, Description 1="RES SMD 10K OHM 1% 1/16W 0402", Features="Automotive AEC-Q200", Height=0.35mm, Lead Free="Lead Free", Length=1mm, Military Standard=Not, Mount="Surface Mount", Number of Pins=2, Number of Terminations=2, Packaging="Tape and Reel", Power Rating=63mW, Pricing="1=0.1, 10=0.042, 100=0.017, 1000=0.00765, 2500=0.00664, 5000=0.00549 (USD)", Radiation Hardening=No, REACH SVHC=Unknown, Stock=713181, Supplier 1=Digi-Key, Termination=SMD/SMT, Voltage Rating (DC)=50V, Weight=2.3E-05oz, Width=0.02inch
U2: "2.4GHz radio module"
U4: "USB-UART Bridge"
U6: "GYRO/ACCELEROMETER 6AXIS 24QFN", Case/Package=QFN, Manufacturer="TDK InvenSense", Max Operating Temperature=85°C, Min Operating Temperature=-40°C, Operating Supply Voltage=3.45V, Package Quantity=5000, Supplier Part Number 1=1428-1011-1-ND, ComponentLink1Description=http://store.invensense.com/Datasheets/invensense/RM-MPU-6500A-00.pdf, ComponentLink1URL=http://store.invensense.com/Datasheets/invensense/RM-MPU-6500A-00.pdf, Manufacturer Part Number=MPU-6500, Mount="Surface Mount", Number of Pins=24, Output Type=Digital, Pricing 1="1=8.31, 5=7.288, 10=6.559, 25=5.83, 50=5.3928, 100=4.664, 500=4.3725, 1000=4.081 (USD)", Sensor Type=Accelerometer,Gyroscope, Stock 1=29119, Supplier 1=Digi-Key
U7: library part TCAN332, Case/Package=SOIC, Manufacturer="Texas Instruments", Max Operating Temperature=125°C, Max Supply Voltage=3.6V, Min Operating Temperature=-40°C, Min Supply Voltage=3V, Supplier Part Number 1=296-43711-1-ND, Category="Interface ICs", ComponentLink1Description=http://www.ti.com/lit/ds/symlink/tcan332.pdf?src-supplier=Digi-Key, ComponentLink1URL=http://www.ti.com/lit/ds/symlink/tcan332.pdf?src-supplier=Digi-Key, ComponentLink2Description=http://www.ti.com/lit/gpn/tcan332?src-supplier=Mouser, ComponentLink2URL=http://www.ti.com/lit/gpn/tcan332?src-supplier=Mouser, ComponentLink3Description=http://www.ti.com/general/docs/lit/getliterature.tsp?genericPartNumber=TCAN332&amp;&amp;fileType=pdf&src-supplier=Farnell, ComponentLink3URL=http://www.ti.com/general/docs/lit/getliterature.tsp?genericPartNumber=TCAN332&amp;&amp;fileType=pdf&src-supplier=Farnell, ComponentLink4Description=http://www.ti.com/general/docs/lit/getliterature.tsp?genericPartNumber=TCAN332&&fileType=pdf&src-supplier=Element14, ComponentLink4URL=http://www.ti.com/general/docs/lit/getliterature.tsp?genericPartNumber=TCAN332&&fileType=pdf&src-supplier=Element14, Data Rate=1Mbps, Description 1="TEXAS INSTRUMENTS         TCAN332DR             CAN Bus, 1, 1, 3 V, 3.6 V, SOIC", Lead Free="Lead Free", Manufacturer Part Number=TCAN332DR, Mount="Surface Mount", Number of Pins=8, Number of Receive Buffers=1, Number of Transmit Buffers=1, Packaging="Cut Tape", Pricing="1=2.01000, 10=1.80200, 25=1.70000, 100=1.36000, 250=1.19000, 500=1.15600, 1000=0.91800 (USD)", REACH SVHC="No SVHC", Receiver Hysteresis=120mV, RoHS=Yes, Stock=14429, Supplier 1=Digi-Key
U8: "Flip Flop Inverted Output"
Y2: library part "NDK Crystal NX3225SA", "SMT Crystal", Case/Package=SMD/SMT, ESR (Equivalent Series Resistance)=80R, Frequency Stability=10ppm, Load Capacitance=10pF, Manufacturer=NDK, Manufacturer Part Number=NX3225SA-16.000000MHZ-T1, Max Operating Temperature=70°C, Min Operating Temperature=-20°C, Package Quantity=3000, Supplier Part Number 1=644-1049-1-ND, ComponentLink1Description="https://media.digikey.com/pdf/Data Sheets/NDK PDFs/NX3225SA-16.000000MHz-T1.pdf?src-supplier=Digi-Key", ComponentLink1URL="https://media.digikey.com/pdf/Data Sheets/NDK PDFs/NX3225SA-16.000000MHz-T1.pdf?src-supplier=Digi-Key", Description 2="CRYSTAL 16.0000MHZ 10PF SMD", Frequency=16MHz, Frequency Tolerance=10ppm, Height=0.028inch, Lead Free="Lead Free", Length=0.126inch, Mount="Surface Mount", Packaging="Tape and Reel", Pricing="1=0.92, 10=0.812, 50=0.7592, 100=0.6709, 500=0.63558, 1000=0.52965 (USD)", Stock=72540, Supplier 1=Digi-Key, Supplier 2=Digi-Key, Supplier Part Number 2=644-1100-6-ND, Width=0.098inch

## Free pads (board coordinates)
  round 47.24 hole 29.53: 1(-581.04,421.26) 3(-1972.44,-472.44) 4(-1055.12,413.39) 5(-1311.02,-429.13) 5(-1283.46,-365.88) 5(-1242.01,-429.13) 5(-1215.24,-365.88) 5(-1153.54,-365.88) 5(-933.07,413.39)

## Via types
v1: diameter 17.72, hole 7.87, Top Layer to Bottom Layer, 33 vias
v2: diameter 24, hole 12, Top Layer to Bottom Layer, 16 vias

## Nets (pads, with @x,y where several pads share a name; then routed paths per layer and width w, separated by ;. In a path a pad name is that pad's centre, name@x,y a point inside that pad or via, vN(x,y) a via of type N, cw(c..) or ccw(c..) an arc to the next point about the centre after c; other vN are vias at no path point)
3V3: C3.2 C4.2 C5.1 C6.1 C7.1 C11.1 C12.1 C17.2 C19.2 C22.1 C23.1 C25.1 C26.1 J8.3 U1.1 U1.13 U1.19 U1.32 U1.48 U1.64 U2.7 U2.15 U2.18 U3.1 U3.10 U6.8 U6.13 U7.3 | length 4586.1
  Top Layer w8: -1708.67,-462.68 ccw(c-1708.67,-458.07) -1704.06,-458.07 U3.1 ; -1393.61,-365.88 cw(c-1372.21,-365.88) -1372.21,-344.48 -1347.12,-344.48 ccw(c-1347.12,-257.2) -1259.84,-257.2 -1259.84,-255.91 ccw(c-1289.63,-255.91) -1289.63,-226.12 U6.13 ; C22.1 ccw(c-1393.61,-262.69) -1378.61,-262.69 U6.8
  Top Layer w10: C17.2 ccw(c-1829.86,-463.25) -1814.3,-463.25 U3.10 ; C23.1 C22.1 ; C6.1 cw(c-1123.28,-145.8) -1123.28,-89.47 U1.48 -1078.59,-89.47 ccw(c-1078.59,10.53) -1015.4,-66.98 ; C7.1 -1127.36,299.83 ccw(c-1097.38,299.83) C3.2 cw(c-1118.58,205.57) -1066.91,257.23 -1061.78,252.1 cw(c-1101.64,212.25) -1045.27,212.25 ; U1.32 -1045.27,212.25 ; -818.65,129.04 ccw(c-889.36,199.75) -789.36,199.75 U1.19 -789.36,319.29 cw(c-787.62,319.29) C26.1 ; -780.14,-69.79 -809.9,-40.02 ccw(c-880.61,-110.73) -816.42,-34.06 ccw(c-880.61,-110.73) -880.61,-10.73 -917.01,-10.73 ccw(c-917.01,-110.73) -987.72,-40.02 ; -780.11,-69.82 ccw(c-732.61,-22.27) -732.61,-89.47 U1.1 ; C4.2@-712.64,-169.47 ccw(c-729.93,-186.77) -729.93,-162.31 U1.64 cw(c-677.16,-162.31) U1.1 ; C25.1 cw(c-633.09,162.2) -633.09,146.75 U1.13 -759.53,146.75 ccw(c-759.53,46.75) -830.24,117.46 -987.72,-40.02 ; U2.7 v1(-499.24,-127) -584.14,-127 cw(c-584.14,-73.23) -622.16,-111.25 ccw(c-674.73,-163.83) -674.73,-89.47 U1.1 ; U2.18 -479.55,67.9 cw(c-440.74,67.9) -475.16,85.84 ccw(c-468.7,85.69) v1(-475.16,85.69) ; v1(-408.46,39.64) -408.46,22.32 ccw(c-402.51,22.32) U2.15 cw(c-381.09,18.12) -381.09,43.75 C11.1 -344.55,43.75 C12.1 ; -1045.27,212.25 -1045.27,178.67 ccw(c-945.27,178.67) -1015.98,107.96 -1015.4,107.38 cw(c-1082.22,40.56) -987.72,40.56 -987.72,-0.16 cw(c-1082.22,-0.16) -1015.4,-66.98 ; -1015.4,-66.98 ccw(c-1078.59,10.53) -1007.88,-60.19 -987.72,-40.02
  Top Layer w15: -1708.67,-462.68 -1699.15,-472.21 ccw(c-1667.86,-440.92) -1667.86,-485.16 -1493.61,-485.16 ; C23.1 -1393.61,-365.88 -1393.61,-385.16 cw(c-1493.61,-385.16) -1493.61,-485.16 ; U7.3 -825.73,-273.08 cw(c-875.73,-273.08) -875.73,-323.08 ; C4.2@-712.61,-169.49 cw(c-769.74,-226.58) -688.98,-226.58 -688.98,-283.51 cw(c-788.98,-283.51) -718.27,-354.22 v2(-729.93,-365.88) ccw(c-772.73,-365.88) -772.73,-323.08 -875.73,-323.08 ; -1493.61,-485.16 -1204.52,-485.16 ccw(c-1204.52,-385.16) -1133.81,-455.87 -1030.3,-352.37 cw(c-959.59,-423.08) -959.59,-323.08 -875.73,-323.08
  Bottom Layer w10: v1(-499.24,-127) ccw(c-557.36,-68.88) -475.16,-68.88 v1(-475.16,85.69) -443.71,54.25 ccw(c-408.46,89.5) v1(-408.46,39.64)
  Bottom Layer w15: v2(-729.93,-365.88) ccw(c-731.93,-363.89) -729.1,-363.89 J8.3
ANT: C8.2 C9.1 J1.1 | length 158.3
  Top Layer w12: C9.1 C8.2 -124.26,-1.57 ccw(c-124.26,3.78) J1.1
B_PWM: LED1.6 U1.41 | length 74.8
  Top Layer w10: LED1.6@-1188.98,62.99 -1176.49,62.99 cw(c-1176.49,36.11) -1160.69,57.86 cw(c-1176.49,36.11) -1157.48,55.12 ccw(c-1141.07,71.53) -1145.65,48.78 ccw(c-1141.07,71.53) -1141.07,48.32 U1.41
BATT_MONITOR: R9.2 R10.1 U1.14 | length 1158.1
  Top Layer w10: R10.1 R9.2 -1611.03,-184.38 ccw(c-1611.03,-171.84) v1(-1602.15,-180.71) ; v1(-744.55,175.81) ccw(c-721.92,198.44) -721.92,166.43 U1.14
  Bottom Layer w10: v1(-1602.15,-180.71) -1572.52,-180.71 ccw(c-1572.52,-80.71) -1501.81,-151.42 -1365.5,-15.1 cw(c-1294.79,-85.81) -1321.29,10.61 ccw(c-1323.94,20.25) -1320.83,10.75 cw(c-1285.52,-99.75) -1285.52,16.25 -1030.83,16.25 ccw(c-1030.83,116.25) -960.12,45.54 -956.69,48.97 ccw(c-1004.22,96.49) -937.01,96.49 -937.01,122.05 cw(c-883.25,122.05) -883.25,175.81 -855.43,175.81 ccw(c-855.43,185.81) -852.43,176.27 cw(c-846.46,157.33) -840.49,176.27 ccw(c-837.48,185.81) -837.48,175.81 v1(-744.55,175.81)
CAN_RX: U1.61 U7.4 | length 120.6
  Top Layer w10: U7.4@-875.73,-242.85 cw(c-839.36,-242.85) -839.36,-206.48 -834.82,-206.48 ccw(c-834.82,-180.71) -809.05,-180.71 U1.61
CAN_TX: U1.62 U7.1 | length 125.9
  Top Layer w10: U1.62 -789.36,-186.8 ccw(c-769.68,-186.8) -769.68,-206.48 cw(c-769.68,-250.43) -725.73,-250.43 U7.1
CANH: J8.2 R1.1 U7.7 | length 190.2
  Top Layer w15: v2(-777.53,-365.88) -777.53,-456.81 ccw(c-775.73,-456.81) U7.7
  Bottom Layer w15: R1.1 cw(c-785.18,-281.49) -777.53,-281.49 v2(-777.53,-365.88)
CANL: J8.1 R1.2 U7.6 | length 192
  Top Layer w15: v2(-826.34,-365.88) -826.34,-458.6 U7.6
  Bottom Layer w15: v2(-826.34,-365.88) -826.34,-285.47 cw(c-814.71,-285.47) R1.2
D+: J4.3 U4.4 | length 172.2
  Top Layer w10: J4.3 -1659.07,215.18 cw(c-1659.07,147.97) -1611.55,195.49 ccw(c-1564.02,243.01) -1564.02,175.81 U4.4
D-: J4.2 U4.5 | length 167
  Top Layer w10: J4.2 -1631.5,136.44 ccw(c-1631.5,164.66) -1611.55,144.7 cw(c-1583.98,117.13) -1583.98,156.12 U4.5
EN_3V3: U1.27
EN_HP: pad.5@-933.07,413.39 U1.28
G_PWM: LED1.5 U1.42 | length 68.8
  Top Layer w10: LED1.5 -1186.81,28.64 U1.42
GND: C1.2 C2.1 C3.1 C4.1 C5.2 C6.2 C7.2 C9.2 C10.2 C11.2 C12.2 C13.2 C14.2 C15.2 C16.2 C17.1 C18.1 C19.1 C20.1 C21.1 C22.2 C23.2 C24.2 C25.2 C26.2 C27.1 C28.2 J1.2 J1.3 J1.4 J1.5 J2.3 J2.4 J4.4 J4.10 J4.11 J4.12 J4.13 J7.1 J7.3 J7.4 J8.4 J8.5 J8.6 pad.3 Q1.2 R2.2 R3.2 R4.2 R5.2 R6.1 R10.2 R11.2 R14.2 R19.2 U1.12 U1.18 U1.31 U1.47 U1.60 U1.63 U2.8 U2.14 U2.17 U2.20 U3.3 U3.9 U3.11 U4.3 U4.29 U5.2 U6.18 U6.20 U6.25 U8.3 Y2.2 Y2.4 | length 324.2
  Top Layer w8: U6.25@-1342.52,-173.23 U6.25@-1331.49,-162.2 ; U6.20 -1331.37,-159.75 cw(c-1356,-159.75) U6.25@-1331.49,-162.2 ; U6.18 ccw(c-1295.94,-197.42) -1331.33,-162.03 U6.25@-1331.49,-162.2
  Top Layer w9: U3.9 -1784.25,-403.53 ccw(c-1784.25,-396.85) U3.11@-1779.53,-401.57
  Top Layer w10: U4.3 -1488.23,195.49 cw(c-1488.23,175.81) U4.29 ; C6.2@-1161.42,-74.8 cw(c-1149.31,-86.91) -1149.31,-69.79 U1.47 ; v1(-630.71,66.48) cw(c-633.29,63.9) -629.64,63.9 C1.2 ; U2.17 -459.87,61.05 cw(c-433.21,61.05) -452.06,79.9
  other v1: -1362.86,-323.08 -1507.87,136.44 -1430.03,138.71 -1011.17,167.13 -1507.87,217.45
  other v2: -1760.24,-403.28 -1759.58,-357.57 -422.46,-333.66 -1996.06,-303.15 -1113.42,-274.37 -1185.04,-255.91 -1025.58,-251.91 -1929.53,-213.91 -221.74,-188.95 -350.39,204.72
HV_BATT_MONITOR: R13.2 R14.1 U1.15 | length 127
  Top Layer w10: U1.15 -604.84,186.12 ccw(c-604.84,218.12) R13.2 R14.1
MPU_INT: U1.44 U6.12 | length 391.7
  Top Layer w8: U6.12 -1296.46,-245.8 cw(c-1296.46,-258.8) -1283.46,-258.8 v1(-1283.46,-255.91)
  Top Layer w10: v1(-1259.84,-213.91) -1259.84,-195.81 cw(c-1187.81,-195.81) -1238.75,-144.87 ccw(c-1282.86,-100.76) -1220.47,-100.76 cw(c-1183.15,-100.76) -1219.94,-94.47 ccw(c-1229.8,-92.79) -1219.8,-92.74 -1219.8,-89.47 cw(c-1164.43,-89.47) -1172.93,-34.76 ; -1188.98,-39.84 cw(c-1164.43,-89.47) -1172.93,-34.76 ; U1.44 -1136.9,-10.73 ccw(c-1136.9,-32.49) -1152.28,-17.11 -1165.15,-29.97 cw(c-1188.98,-6.14) -1168.39,-32.82 cw(c-1174.46,-24.88) -1172.66,-34.72 cw(c-1174.46,-24.88) -1172.87,-34.75 cw(c-1174.46,-24.88) -1172.93,-34.76
  Bottom Layer w10: v1(-1283.46,-255.91) ccw(c-1283.46,-232.28) -1259.84,-232.28 v1(-1259.84,-213.91)
MPU_SS: U1.45 U6.22 | length 377.1
  Top Layer w8: U6.22 -1362.86,-111.25 cw(c-1347.12,-111.25) v1(-1347.12,-95.5) ; U1.45 -1095.54,-30.42 cw(c-1095.54,-54.39) v1(-1078.59,-37.44)
  Bottom Layer w8: v1(-1347.12,-95.5) -1312.4,-60.79 cw(c-1241.69,-131.5) -1241.69,-31.5 -1085.61,-31.5 cw(c-1085.61,-41.21) -1078.74,-34.34 -1078.59,-34.49 v1(-1078.59,-37.44)
NetC1_1: C1.1 U1.7 | length 51.7
  Top Layer w10: U1.7 -667.66,28.64 cw(c-667.66,-25.13) C1.1
NetC2_2: C2.2 U1.30 | length 64.5
  Top Layer w10: C2.2@-1009.84,342.1 cw(c-1019.36,332.58) -1005.9,332.58 U1.30
NetC8_1: C8.1 L1.2 | length 28.3
  Top Layer w12: L1.2 C8.1
NetC10_1: C10.1 U2.19 | length 33.4
  Top Layer w10: C10.1 cw(c-524.64,65.04) -499.24,65.04 U2.19
NetC13_1: C13.1 C14.1 L3.2 U2.11 | length 168
  Top Layer w10: U2.11 -406.72,-63.34 ccw(c-374.55,-63.34) C13.1 C14.1 -303.61,-53.14 cw(c-302.66,-53.14) L3.2
NetC15_1: C15.1 R7.1 U2.10 Y2.1 | length 173.8
  Top Layer w10: U2.10 ccw(c-415.91,-94.09) -433.07,-111.25 -431.64,-112.68 cw(c-463.83,-144.87) R7.1 -418.31,-160.05 ccw(c-371.34,-160.05) Y2.1 ccw(c-387.31,-193.26) -387.31,-210.5 C15.1
NetC16_1: C16.1 R7.2 U2.9 Y2.3 | length 253.8
  Top Layer w10: C16.1 -505.42,-242 cw(c-505.42,-256.25) Y2.3 -485.1,-256.25 ccw(c-485.1,-220.57) -459.87,-245.8 ccw(c-488.91,-216.75) -447.83,-216.75 R7.2 -447.83,-139.59 ccw(c-468,-139.59) -453.74,-125.33 cw(c-438.95,-110.54) -459.87,-110.54 U2.9
NetC18_2: C18.2 D1.1 M2.1
NetC24_1: C24.1 U6.10 | length 42
  Top Layer w8: U6.10 -1347.12,-259.93 ccw(c-1329.36,-259.93) C24.1
NetC27_2: C27.2 D2.2 M1.1 R8.1 U3.5 | length 132.1
  Top Layer w10: M1.1@-1759.18,-277.69 -1759.18,-295.94 ccw(c-1749.18,-295.92) -1749.18,-305.92 -1748.03,-305.92 -1737.39,-305.92 cw(c-1737.39,-342.52) U3.5@-1700.79,-342.52
  Top Layer w15: D2.2 R8.1
NetC28_1: C28.1 R8.2 U3.6 U3.7 U3.8 | length 102.5
  Top Layer w10: C28.1 -1835.66,-375 cw(c-1835.66,-405.21) U3.8 U3.7 U3.6 R8.2
NetD1_2: D1.2 M1.3 | length 81.9
  Top Layer w10: D1.2 cw(c-1866.49,-265.78) -1798.41,-197.69 -1794,-202.11
NetL1_1: L1.1 L2.2 U2.13 | length 78.5
  Top Layer w10: U2.13 -365.5,-21.25 ccw(c-365.5,-20.31) L2.2 ccw(c-364.55,4.6) -346.94,-13.01 L1.1
NetL2_1: L2.1 L3.1 U2.12 | length 75.2
  Top Layer w10: U2.12 -391.74,-40.94 cw(c-391.74,-79.38) L2.1 L3.1
NetL4_1: L4.1 U3.4 | length 36.5
  Top Layer w10: U3.4 ccw(c-1704.06,-318.66) -1671.89,-350.83 L4.1@-1671.32,-350.27
NetL4_2: L4.2 U3.2 | length 36.7
  Top Layer w10: U3.2 cw(c-1704.06,-448.29) -1672.41,-416.64 L4.2@-1671.32,-417.73
NetLED1_1: LED1.1 R3.1 | length 39.2
  Top Layer w10: R3.1 -1238.75,63.72 cw(c-1238.75,59.12) LED1.1
NetLED1_2: LED1.2 R4.1 | length 36.6
  Top Layer w10: R4.1 LED1.2
NetLED1_3: LED1.3 R5.1 | length 39.2
  Top Layer w10: R5.1 -1238.75,-6.28 ccw(c-1238.75,-1.67) LED1.3
NetLED2_C: LED2.C R19.1 | length 48.3
  Top Layer w10: LED2.C R19.1
NetLED3_C: LED3.C R12.1 | length 42.1
  Top Layer w10: R12.1 -1922.18,18.38 ccw(c-1922.18,47.71) LED3.C
NetM2_2: M2.2 Q1.3
NetQ1_1: Q1.1 U8.1 U8.4
NetR6_2: R6.2 U2.16 | length 67.8
  Top Layer w10: U2.16 ccw(c-440.18,77.45) -414.32,77.45 R6.2
NetR11_1: R11.1 U5.5 | length 44.5
  Top Layer w10: U5.5 cw(c-1831.46,-49.44) -1831.46,-15.58 R11.1
NetR12_2: R12.2 U5.1 | length 50.2
  Top Layer w10: R12.2 -1970.8,-14.42 ccw(c-1959.73,-14.42) U5.1
NetR17_2: R17.2 U4.9 | length 50.6
  Top Layer w8: U4.9 -1507.92,51.02 ccw(c-1487.08,51.02) R17.2
NetR18_2: R18.2 U4.11 | length 49.5
  Top Layer w8: U4.11 -1468.55,56.85 ccw(c-1441.71,56.85) R18.2
NRF_CE: U1.10 U2.1 | length 164.5
  Top Layer w8: U1.10 -633.46,87.69 cw(c-633.46,51.02) -596.79,51.02 ccw(c-563.89,51.02) -577.26,20.96 ccw(c-563.89,51.02) -563.89,18.12 U2.1
NRF_INT: U1.2 U2.6 | length 172.8
  Top Layer w8: U1.2 -660.36,-69.79 cw(c-660.36,-148.31) -604.84,-92.79 ccw(c-565.16,-53.11) -565.16,-109.22 -555.46,-109.22 ccw(c-555.46,-57.55) U2.6
NRF_SS: U1.4 U2.2 | length 132.5
  Top Layer w8: U1.4 -652.52,-30.42 ccw(c-652.52,4.11) -628.1,-20.31 cw(c-582.86,-65.55) -582.86,-1.57 -582.2,-1.57 U2.2
R_PWM: LED1.4 U1.43 | length 70.4
  Top Layer w10: LED1.4@-1185.04,-3.94 -1172.55,-3.94 ccw(c-1172.55,22.95) -1153.54,3.94 cw(c-1141.44,-8.17) -1141.44,8.95 U1.43
SPI3_MISO: U1.22 U2.5 U6.9 | length 1463.9
  Top Layer w8: v1(-1362.86,-287.4) U6.9
  Top Layer w10: v1(-888.96,100) -888.96,164.39 cw(c-815.81,153.51) -868.1,205.8 ccw(c-915.63,253.33) -848.42,253.33 U1.22 ; v1(-581.04,-81.37) cw(c-560.29,-81.37) -560.29,-60.62 U2.5
  Bottom Layer w10: v1(-1362.86,-287.4) -1362.86,-216.33 cw(c-1262.86,-216.33) -1333.58,-145.61 -1285.45,-97.49 cw(c-1214.74,-168.2) -1214.74,-68.2 -708.91,-68.2 ; v1(-888.96,100) ccw(c-789.76,112.66) -860.47,41.95 -779.62,-38.91 ccw(c-708.91,31.8) -708.91,-68.2 ; v1(-581.04,-81.37) -601.99,-81.37 cw(c-601.99,-56.06) -619.89,-73.96 ccw(c-633.81,-87.87) -633.81,-68.2 -708.91,-68.2
SPI3_MOSI: U1.23 U2.4 U6.24 | length 1304
  Top Layer w8: v1(-1409.49,-94.09) cw(c-1409.49,-109.22) -1394.36,-109.22 U6.24 ; v1(-596.79,-52.2) cw(c-569.61,-79.38) -569.61,-40.94 U2.4
  Top Layer w10: v1(-913.38,106.3) -913.38,156.18 cw(c-829.95,156.18) -896.58,206.39 ; U1.23 -868.1,276.28 cw(c-968.1,276.28) -888.95,215.18 ; -896.58,206.39 ccw(c-968.1,276.28) -888.95,215.18 ; -896.58,206.39 cw(c-829.95,156.18) -888.95,215.18